# Altium PCB PCB1.PcbDoc
Units mil, origin at the board's own origin, x right, y up, seen from the top; angles counter-clockwise.
Board outline 3110 x 1675 mil, 2 copper layers (Top Layer, Bottom Layer); 17 components, 18 nets, 75 pads, 2 vias.
Unrouted connection lines stored in the file: 2.
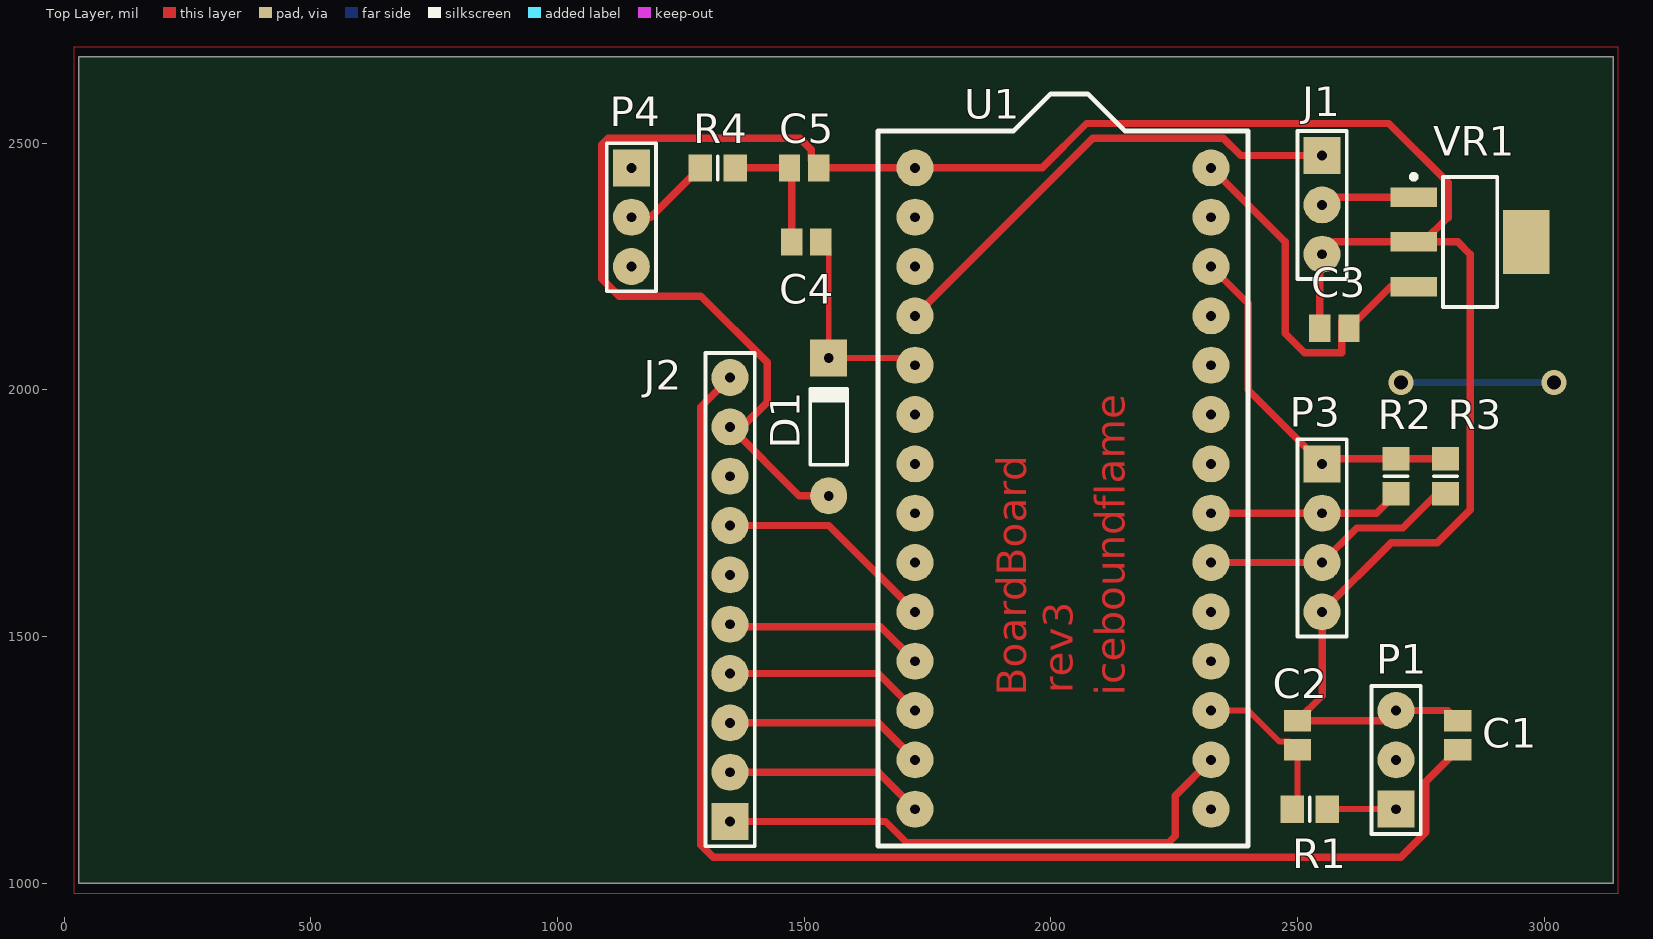
[diagram p0: Top Layer view]
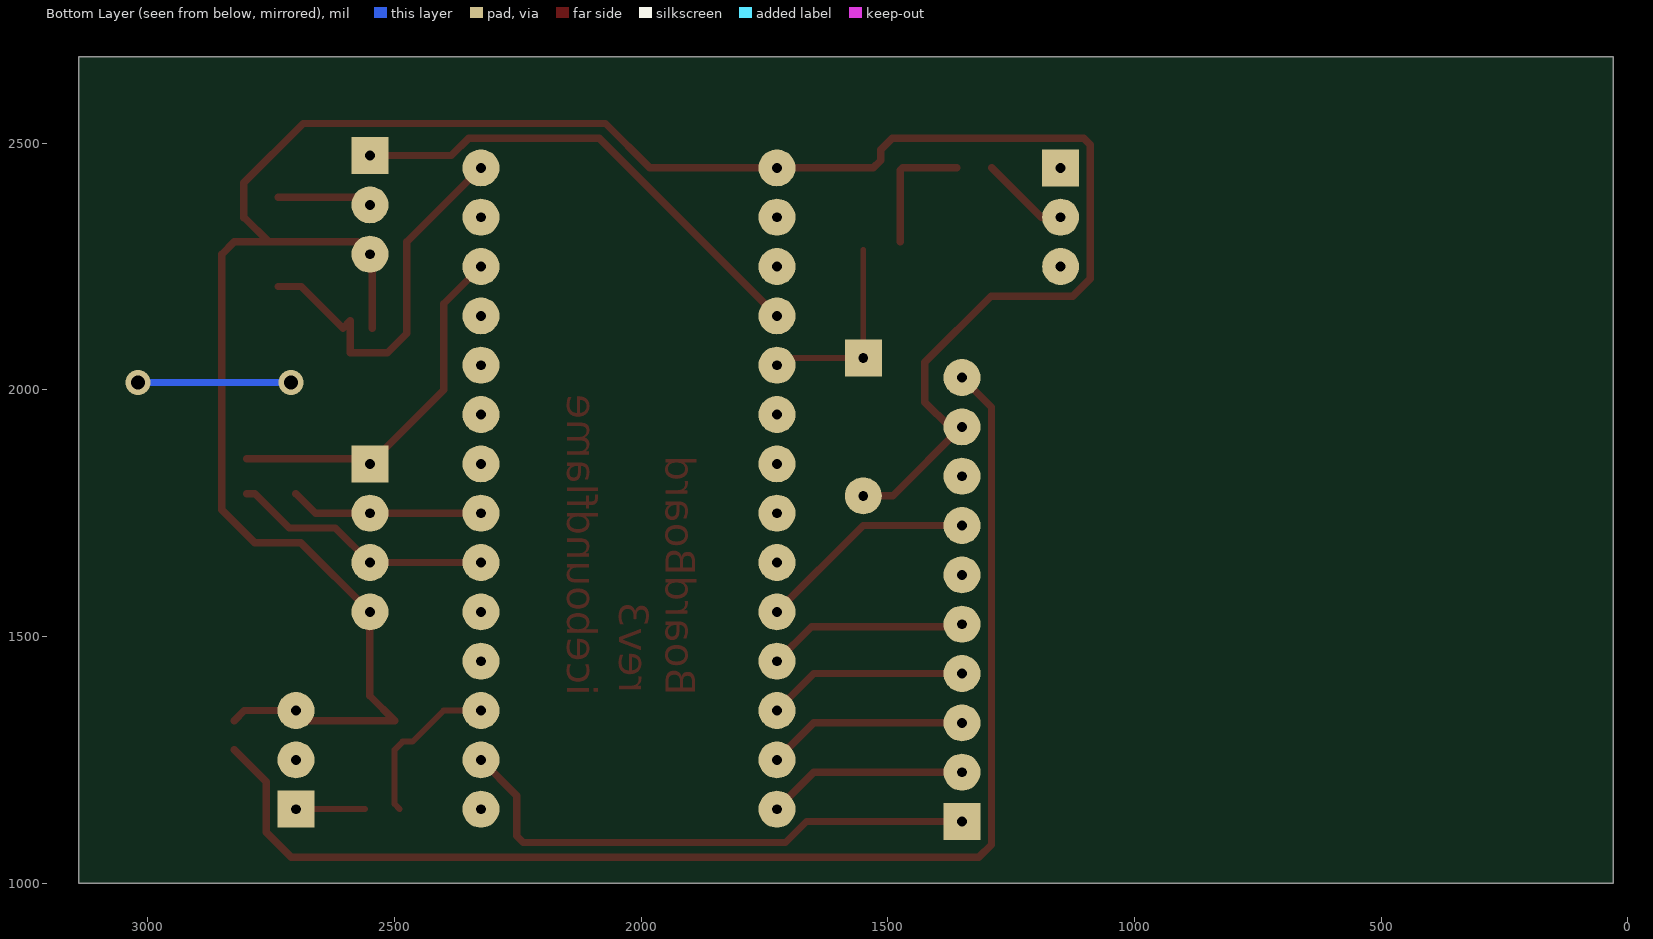
[diagram p1: Bottom Layer view, seen from below]

## Layer stack, top to bottom
Top Solder: solder mask 0.4, Solder Resist, Dk 3.5
Top Layer: signal copper 1.4
Dielectric 1: dielectric 12.6, FR-4, Dk 4.8
Bottom Layer: signal copper 1.4
Bottom Solder: solder mask 0.4, Solder Resist, Dk 3.5

## Board outline
30,1000 3140,1000 3140,2675 30,2675

## Design rules (kind name [scope] priority, off if disabled: settings)
Clearance [All] p1: gap=15
PolygonConnect [All] p1: connectstyle=Relief reliefconductorwidth=10 reliefentries=4 polygonreliefangle="90 Angle" airgapwidth=10
RoutingLayers [All] p1: top layer_v5=TRUE bottom layer_v5=FALSE
RoutingVias [All] p1: holewidth=28 width=50 viastyle="Through Hole" minholewidth=28 minwidth=50 maxholewidth=28 maxwidth=50
SolderMaskExpansion [All] p1: expansion=4
UnpouredPolygon [All] p1: allowunpoured=FALSE
Width Width_Pwr [InNetClass('Power')] p1: maxlimit=30 minlimit=15 preferedwidth=15 minimp=50.000000 maximp=50.000000 favimp=50.000000
Width [All] p2: maxlimit=25 minlimit=12 preferedwidth=20 minimp=50.000000 maximp=50.000000 favimp=50.000000
28 further rules are at their usual default settings.

## Classes and differential pairs
component class boardboard: C1 C2 C3 C4 C5 D1 J1 J2 P1 P3 P4 R1 R2 R3 R4 VR1
net class Power: +3V3 +5V GND

## Components (designator, comment, footprint, x,y, rotation, side; value= is the part's Value field where it differs from the comment)
C1 "Cap Pol3" C0805 2825,1300 r90 top
C2 "Cap" C0805 2500,1300 r270 top
C3 "Cap Pol3" C0805 2575,2125 r180 top
C4 "Cap" C0805 1504.53,2300 r0 top
C5 "Cap" C0805 1500,2450 r180 top
D1 "3V3" DO-35 1550,1925 r90 top
J1 "ESC_AND_BEC" HDR1X3 2550,2475 r270 top
J2 "ADAFRUIT_NRF8001" HDR1X10 1350,1125 r90 top
P1 "Header 3" HDR1X3 2700,1150 r90 top
P3 "Header 4" HDR1X4 2550,1850 r270 top
P4 "Header 3" HDR1X3 1150,2450 r270 top
R1 "Res3" 6-0805_N 2525,1150 r0 top
R2 "Res3" 6-0805_N 2700,1825 r90 top
R3 "Res3" 6-0805_N 2800,1825 r90 top
R4 "Res3" 6-0805_N 1325,2450 r0 top
U1 "TeensyBasic" TeensyBasic 1225,1650 r0 top
VR1 "Volt Reg" SOT223_N 2850,2300 r0 top

## Footprints (in the part's own frame and the unit in brackets; to place one, negate y for a bottom-side part, rotate by r counter-clockwise, add the part's x,y. Pads: shape width x height; smd on the part's side, far side on the other; paste and mask are expansions set on the pad)
6-0805_N [mm] "Chip Resistor, Body 2.0x1.2mm, IPC Medium Density"
  rect 1.2x1.4 smd: 1(-0.9,0) 2(0.9,0)
  silkscreen extent 0,-0.6 0,0.6, body extent -1.07,-0.7 1.07,0.7, height 0.7
C0805 [mm] "Chip Capacitor, Body 2.0x1.3mm, IPC High Density"
  rect 1.1x1.4 smd: 1(-0.75,0) 2(0.75,0)
  body extent -1.1,-0.72 1.1,0.72, height 1.4
DO-35 [mil] "Diode, Axial; Body 3.8 x 1.9 mm (LxDia. max), Lead Dia. 0.53 mm (max)"
  round 75 hole 20: 1(-139.76,0)
  rect 75x75 hole 20: 2(139.76,0)
  silkscreen extent -77,-37 81,37
HDR1X3 [mil] "Connector; Header; 3 Position"
  rect 75x75 hole 20: 1(0,0)
  round 75 hole 20: 2(100,0) 3(200,0)
  silkscreen extent -50,-50 250,50
HDR1X4 [mil] "Connector; Header; 4 Position"
  rect 75x75 hole 20: 1(0,0)
  round 75 hole 20: 2(100,0) 3(200,0) 4(300,0)
  silkscreen extent -50,-50 350,50
HDR1X10 [mil] "Connector; Header; 10 Position"
  rect 75x75 hole 20: 1(0,0)
  round 75 hole 20: 2(100,0) 3(200,0) 4(300,0) 5(400,0) 6(500,0) 7(600,0) 8(700,0) 9(800,0) 10(900,0)
  silkscreen extent -50,-50 950,50
SOT223_N [mm] "SOT223, 4-Leads, Body 6.5x3.5mm, Pitch 2.3mm, Lead Span 7mm, IPC Medium Density"
  rect 2.4x1 smd: 1(-2.9,2.3) 2(-2.9,0) 3(-2.9,-2.3)
  rect 2.4x3.3 smd: 4(2.9,0)
  silkscreen extent -3.02,-3.35 1.4,3.47, body extent -1.85,-3.35 1.85,3.35, height 1.7
TeensyBasic [mil]
  round 75 hole 20: 1(500,800) 2(500,700) 3(500,600) 4(500,500) 5(500,400) 6(500,300) 7(500,200) 8(500,100) 9(500,0) 10(500,-100) 11(500,-200) 12(500,-300) 13(500,-400) 14(500,-500) 15(1100,-500) 16(1100,-400) 17(1100,-300) 18(1100,-200) 19(1100,-100) 20(1100,0) 21(1100,100) 22(1100,200) 23(1100,300) 24(1100,400) 25(1100,500) 26(1100,600) 27(1100,700) 28(1100,800)
  silkscreen extent 425,-575 1175,950

## Part data
C1 C3: "Polarized Capacitor (Surface Mount)"
C2 C4 C5: "Capacitor"
D1: library part "D Zener", "Zener Diode"
P1 P4: "Header, 3-Pin"
P3: "Header, 4-Pin"
R1 R2 R3 R4: "Resistor"
VR1: "Voltage Regulator"

## Via types
v1: diameter 50, hole 28, Top Layer to Bottom Layer, 2 vias

## Nets (pads, with @x,y where several pads share a name; then routed paths per layer and width w, separated by ;. In a path a pad name is that pad's centre, name@x,y a point inside that pad or via, vN(x,y) a via of type N, cw(c..) or ccw(c..) an arc to the next point about the centre after c; other vN are vias at no path point)
+3V3: C1.1 J2.10 P1.2 P3.1 R2.2 R3.2 U1.26 | length 3415
  Top Layer w15: J2.10 1290,1965 1290,1078.18 1315.68,1052.5 2709.32,1052.5 2760,1103.18 2760,1205.47 C1.1 ; U1.26 2400,2175 2400,2000 P3.1 2560.43,1860.43 R2.2 R3.2
+5V: C3.1 U1.28 VR1.3 | length 781
  Top Layer w15: U1.28 2475,2300 2475,2114.44 2514.5,2074.94 2576.45,2074.94 2576.5,2075 2589.63,2075 2589.63,2139.9 C3.1 2688.98,2209.45 VR1.3
BLE_READY: J2.5 U1.11 | length 409
  Top Layer w15: J2.5 1350,1520 1655,1520 U1.11
BLE_RESET: J2.7 U1.10 | length 447.5
  Top Layer w15: J2.7 1550,1725 U1.10
CS: J2.4 U1.12 | length 406.1
  Top Layer w15: J2.4 1650,1425 U1.12
CURSENSE: C2.2 R1.1 U1.17 | length 332.7
  Top Layer w12: U1.17 2400.62,1350 2463.74,1286.87 2483.6,1286.87 C2.2 2500,1160.43 R1.1
GND: C1.2 C2.1 C3.2 C5.1 D1.1 J1.3 J2.9 P1.3 P3.4 U1.1 VR1.2 | length 5058.5
  Top Layer w15: D1.1 1489.76,1785.24 J2.9 1375,1925 1425,1975 1425,2056.07 1291.07,2190 1125.15,2190 1090,2225.15 1090,2496.82 1103.18,2510 1491.5,2510 1514.63,2486.88 1514.63,2464.9 C5.1 U1.1 1982.57,2450 2072.57,2540 2685.13,2540 2805.57,2419.56 2805.57,2348.37 2803.78,2348.37 VR1.2@2755.41,2300 ; C3.2 2545.47,2270.47 J1.3 2575,2300 VR1.2 VR1.2@2755.41,2300 ; C1.2 2804.53,1350 P1.3 2679.53,1329.53 C2.1 2550,1379.53 P3.4 2690,1690 2783.43,1690 2850.06,1756.63 2850.06,1893.43 2850,1893.49 2850,2275 2825,2300 VR1.2@2755.41,2300
MISO: J2.2 U1.14 | length 406.1
  Top Layer w15: J2.2 1650,1225 U1.14
MOSI: J2.3 U1.13 | length 406.1
  Top Layer w15: J2.3 1650,1325 U1.13
NetC4_1: C4.1 C5.2 R4.2 | length 261.9
  Top Layer w15: R4.2 C5.2 1475,2445.47 C4.1
NetC4_2: C4.2 D1.2 U1.5 | length 400.4
  Top Layer w12: C4.2@1550,2284.06 D1.2 1710.24,2064.76 U1.5
NetJ1_2: J1.2 VR1.1 | length 192.3
  Top Layer w15: J1.2 2565.55,2390.55 VR1.1
NetP1_1: P1.1 R1.2 | length 139.6
  Top Layer w12: R1.2 P1.1
NetP3_2: P3.2 R2.1 U1.21 | length 391.4
  Top Layer w15: U1.21 P3.2 2660.43,1750 R2.1
NetP3_3: P3.3 R3.1 U1.20 | length 532.8
  Top Layer w15: U1.20 P3.3 2620,1720 2713.43,1720 2783,1789.57 R3.1
NetP4_2: P4.2 R4.1 | length 181
  Top Layer w15: P4.2 1189.57,2350 R4.1
PWM_OUT: J1.1 U1.4 | length 988.6
  Top Layer w15: U1.4 2085,2510 2349.85,2510 2384.85,2475 J1.1
SCK: J2.1 U1.16 | length 1109.9
  Top Layer w15: J2.1 1665.15,1125 1707.65,1082.5 2239.32,1082.5 2252.5,1095.68 2252.5,1177.5 U1.16
pads on no net: J2.6 J2.8 P4.1 P4.3 U1.2 U1.3 U1.6 U1.7 U1.8 U1.9 U1.15 U1.18 U1.19 U1.22 U1.23 U1.24 U1.25 U1.27 VR1.4
copper on no net: | length 310
  Bottom Layer w15: v1(2710,2015) v1(3020,2015)

## Polygon pours and split planes (outlines as drawn)
GND on Top Layer "Top Layer GND" (solid, shelved, pour order 2): 20,2695 20,980 3150,980 3150,2695

## Other copper
Top Layer:
  text "rev3" at 2045,1385 h60 r90
  text "BoardBoard" at 1950,1380 h60 r90
  text "iceboundflame" at 2150,1380 h60 r90